# Altium PCB Top Layer.PcbDoc
Units mm, origin at the board's own origin, x right, y up, seen from the top; angles counter-clockwise.
Board outline 59 x 59 mm, 2 copper layers (Top Layer, Bottom Layer); 6 components, 24 nets, 36 pads, 0 vias.
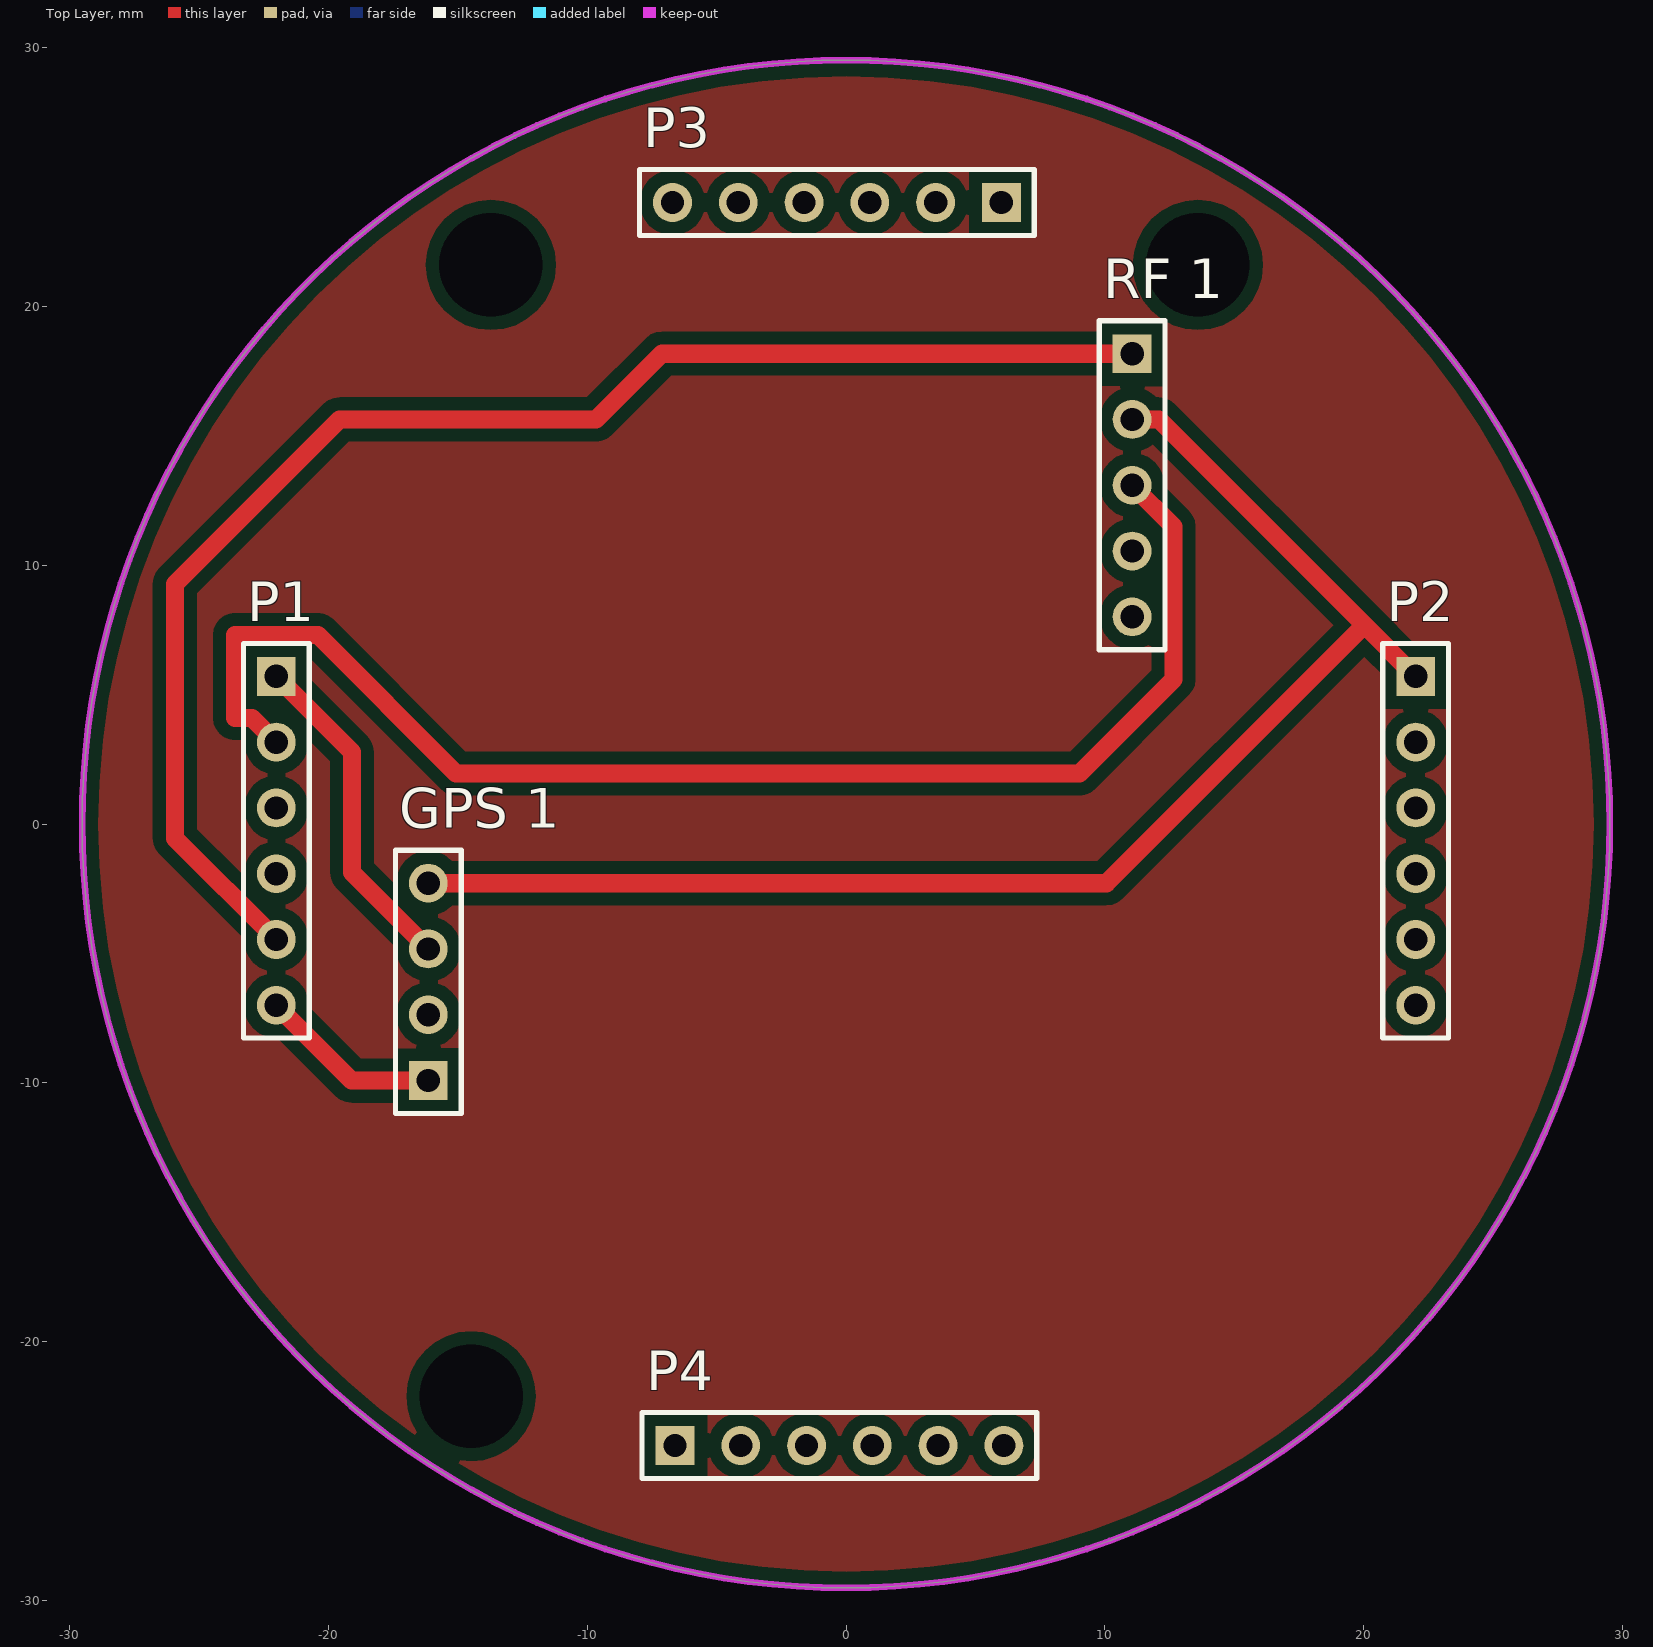
[diagram p0: Top Layer view]
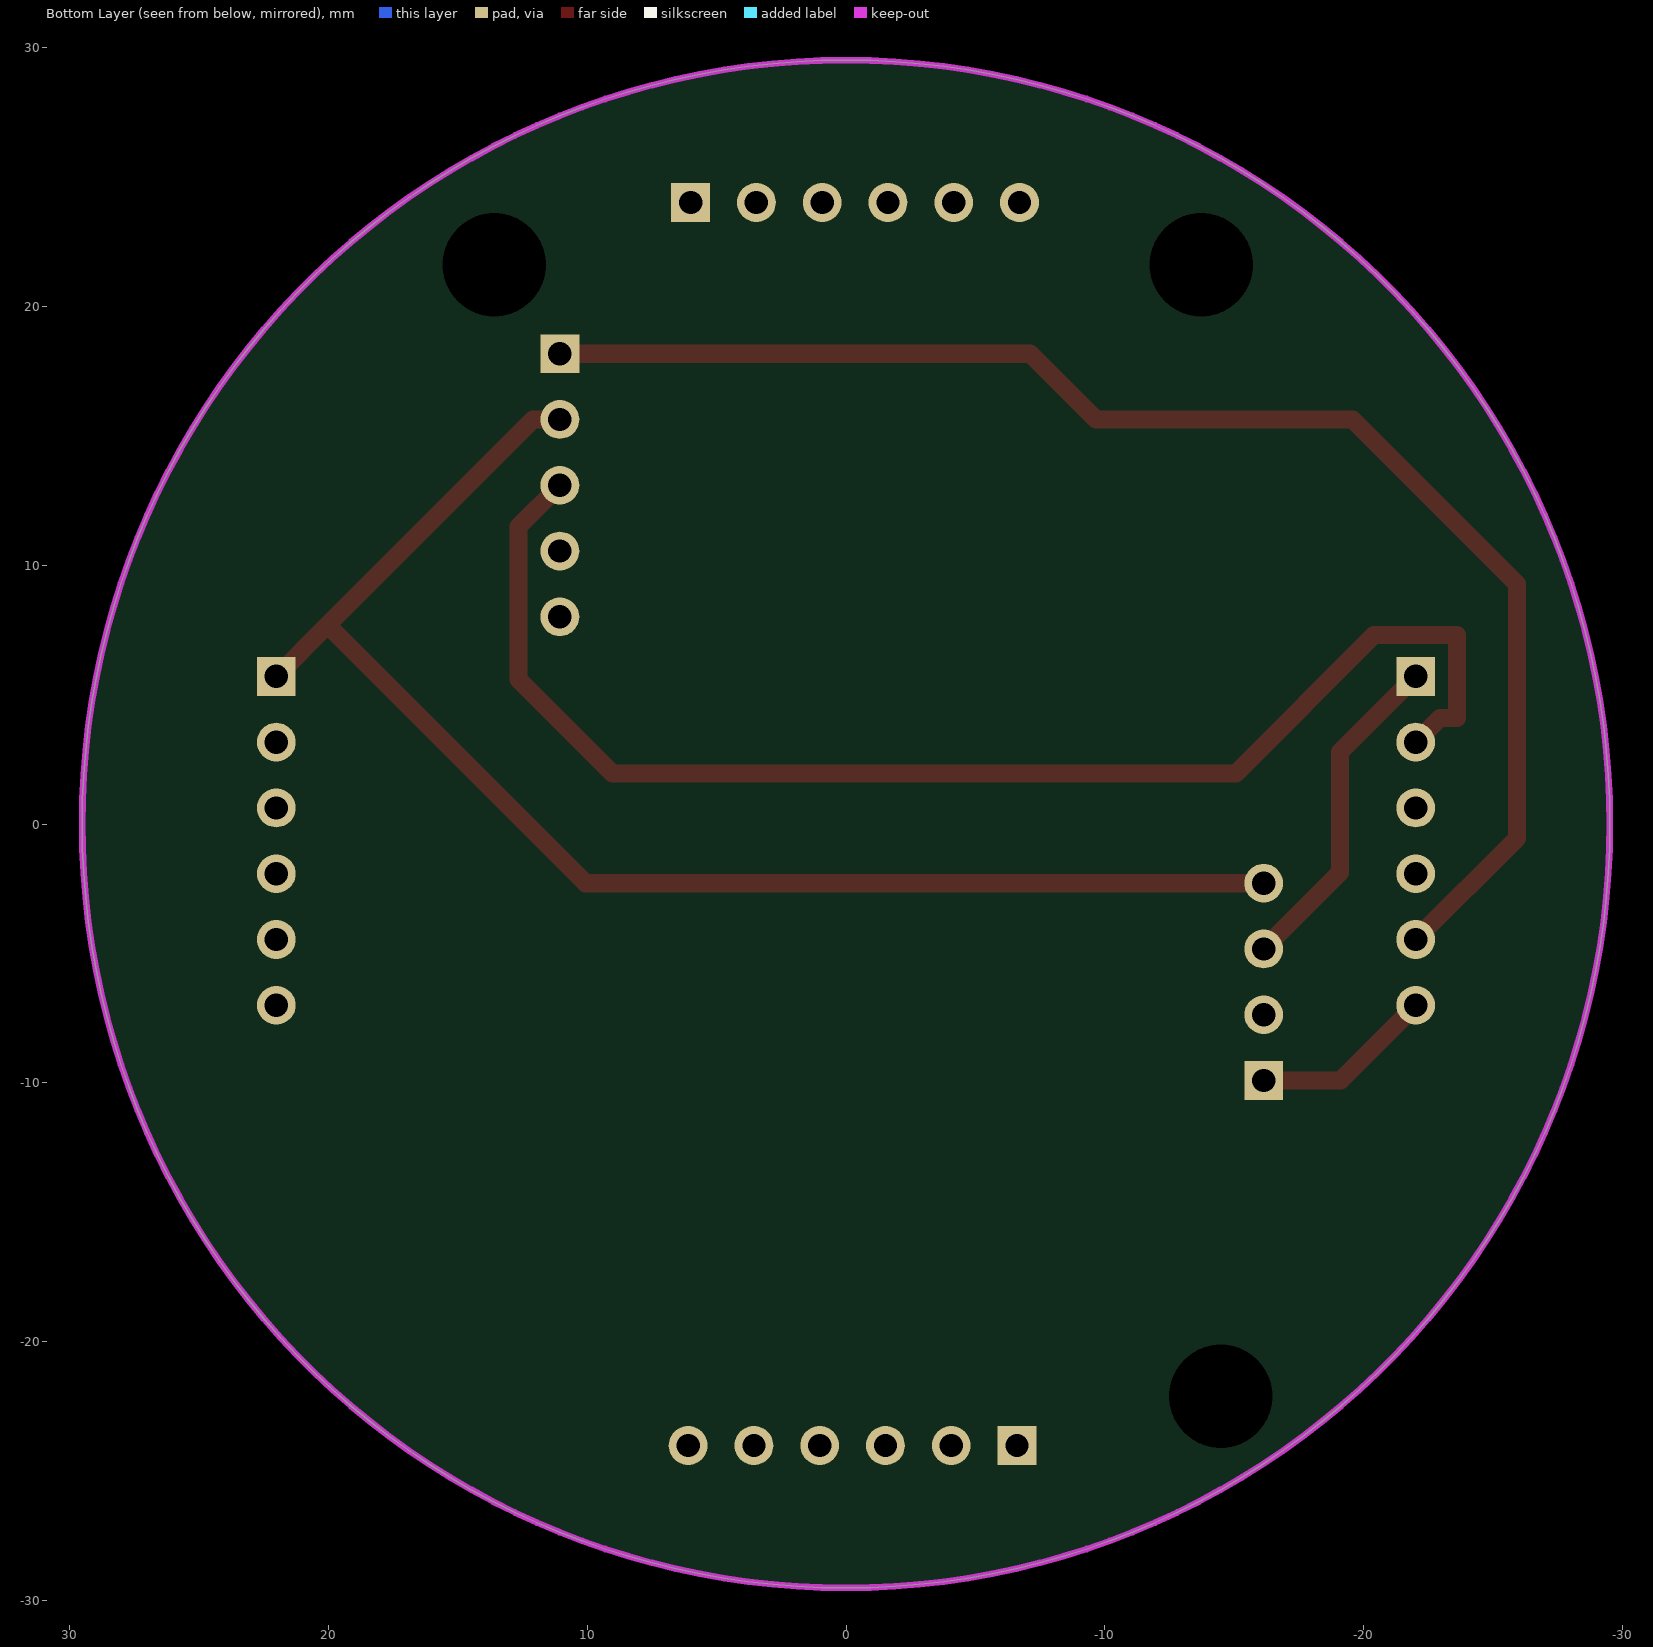
[diagram p1: Bottom Layer view, seen from below]

## Layer stack, top to bottom
Top Solder: solder mask 0.0102, Solder Resist, Dk 3.5
Top Layer: signal copper 0.0356
Dielectric 1: dielectric 0.32, FR-4, Dk 4.8
Bottom Layer: signal copper 0.0356
Bottom Solder: solder mask 0.0102, Solder Resist, Dk 3.5

## Board outline
-29.5,0 ccw(c0,0) 0,-29.5 ccw(c0,0) 29.5,0 ccw(c0,0) 0,29.5 ccw(c0,0)

## Design rules (kind name [scope] priority, off if disabled: settings)
Clearance [All] p1: gap=0.5 ignorepadtopadclearanceinfootprint=FALSE
ComponentClearance [All] p1: gap=0 collisioncheckmode=3 verticalgap=0 showdistances=FALSE
PolygonConnect [All] p1: connectstyle=Relief reliefconductorwidth=0.254 reliefentries=4 polygonreliefangle="90 Angle" airgapwidth=0.254
RoutingLayers [All] p1: top layer_v5=TRUE bottom layer_v5=FALSE
RoutingVias [All] p1: holewidth=0.711 width=1.27 viastyle="Through Hole" minholewidth=0.711 minwidth=1.27 maxholewidth=0.711 maxwidth=1.27
SolderMaskExpansion [All] p1: expansion=0.102
Width [All] p1: maxlimit=1 minlimit=0.5 preferedwidth=0.7
28 further rules are at their usual default settings.

## Components (designator, comment, footprint, x,y, rotation, side; value= is the part's Value field where it differs from the comment)
"GPS 1" "Header 4" HDR1X4 -16.129,-9.906 r90 top
P1 "Header 6" HDR1X6 -22,5.7 r270 top
P2 "Header 6" HDR1X6 22,5.7 r270 top
P3 "Header 6" HDR1X6 6,24 r180 top
P4 "Header 6" HDR1X6 -6.604,-24 r0 top
"RF 1" "Header 5" HDR1X5 11.049,18.161 r270 top

## Footprints (in the part's own frame and the unit in brackets; to place one, negate y for a bottom-side part, rotate by r counter-clockwise, add the part's x,y. Pads: shape width x height; smd on the part's side, far side on the other; paste and mask are expansions set on the pad)
HDR1X4 [mm] "Connector; Header; 4 Position"
  rect 1.5x1.5 hole 0.9: 1(0,0)
  round 1.5 hole 0.9: 2(2.54,0) 3(5.08,0) 4(7.62,0)
  silkscreen extent -1.27,-1.27 8.89,1.27
HDR1X5 [mm] "Connector; Header; 5 Position"
  rect 1.5x1.5 hole 0.9: 1(0,0)
  round 1.5 hole 0.9: 2(2.54,0) 3(5.08,0) 4(7.62,0) 5(10.16,0)
  silkscreen extent -1.27,-1.27 11.43,1.27
HDR1X6 [mm] "Connector; Header; 6 Position"
  rect 1.5x1.5 hole 0.9: 1(0,0)
  round 1.5 hole 0.9: 2(2.54,0) 3(5.08,0) 4(7.62,0) 5(10.16,0) 6(12.7,0)
  silkscreen extent -1.27,-1.27 13.97,1.27

## Part data
"GPS 1": "Header, 4-Pin", LatestRevisionDate=17-Jul-2002, LatestRevisionNote="Re-released for DXP Platform.", Publisher="Altium Limited"
P1 P2 P3 P4: "Header, 6-Pin", LatestRevisionDate=17-Jul-2002, LatestRevisionNote="Re-released for DXP Platform.", Publisher="Altium Limited"
"RF 1": "Header, 5-Pin", LatestRevisionDate=17-Jul-2002, LatestRevisionNote="Re-released for DXP Platform.", Publisher="Altium Limited"

## Free pads (board coordinates)
  round 0 hole 4: 2(-14.478,-22.098) 2(-13.716,21.59) 2(13.589,21.59)

## Nets (pads, with @x,y where several pads share a name; then routed paths per layer and width w, separated by ;. In a path a pad name is that pad's centre, name@x,y a point inside that pad or via, vN(x,y) a via of type N, cw(c..) or ccw(c..) an arc to the next point about the centre after c; other vN are vias at no path point)
"3.3 volt": "GPS 1.1" P1.6 | length 7.1
  Top Layer w0.7: P1.6 -19.094,-9.906 -16.129,-9.906
"5 volt": "RF 1.1" P1.5 | length 56
  Top Layer w0.7: P1.5 -25.908,-0.552 -25.908,9.271 -19.558,15.621 -9.652,15.621 -7.112,18.161 11.049,18.161
"Analog 0": P3.5
"Analog 1": P3.4
"Analog 2": P3.3
"Analog 3": P3.2
AREF: P3.6
CS: P1.4
"Digital 3": P3.1
"Digital 5": P4.1
"Digital 6": P4.2
"Digital 7": P4.3
"Digital 8": P4.4
"Digital 9": P4.5
"Digital 10": P4.6
GND: "GPS 1.4" "RF 1.2" P2.1 | length 55.3
  Top Layer w0.7: -16.129,-2.286 10.058,-2.286 20.022,7.678 ; 11.049,15.621 12.079,15.621 20.022,7.678 ; P2.1 20.022,7.678
INT: P1.3
MISO: P2.5
MOSI: P2.6
RX: "GPS 1.3" P1.1 | length 13
  Top Layer w0.7: P1.1 -19.075,2.775 -19.075,-1.88 -16.129,-4.826
SCK: P2.4
SCL: P2.2
SDA: P2.3
TX: "RF 1.3" P1.2 | length 53.3
  Top Layer w0.7: P1.2 -22.94,4.1 -23.6,4.1 -23.6,7.3 -20.396,7.3 -15.052,1.956 9.017,1.956 12.649,5.588 12.649,11.481 11.049,13.081
pads on no net: "GPS 1.2" "RF 1.4" "RF 1.5"

## Polygon pours and split planes (outlines as drawn)
no net on Top Layer "Top Layer" (solid, pour order 2): -29.5,0 ccw(c0,0) 0,-29.5 ccw(c0,0) 29.5,0 ccw(c0,0) 0,29.5 ccw(c0,0)

## Keep-outs
Keep-Out Layer:
  circle w0.254: c0,0 r29.5